# Altium PCB LED_BUFFER_v1.PcbDoc
Units mil, origin at the board's own origin, x right, y up, seen from the top; angles counter-clockwise.
Board outline 11023.62 x 1771.65 mil, 2 copper layers (Top Layer, Bottom Layer); 69 components, 164 nets, 477 pads, 85 vias.
Unrouted connection lines stored in the file: 58.
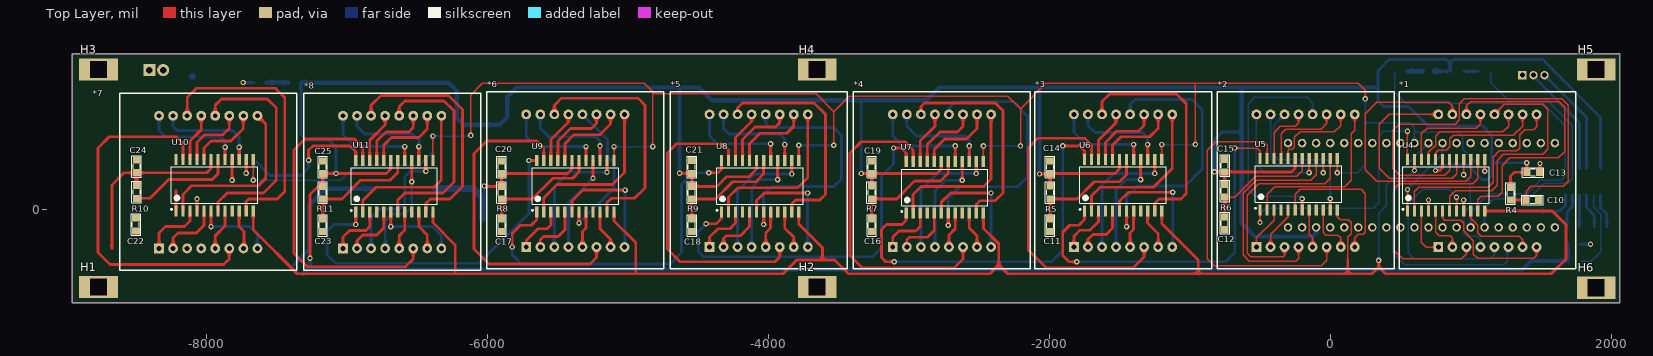
[diagram p0: Top Layer view]
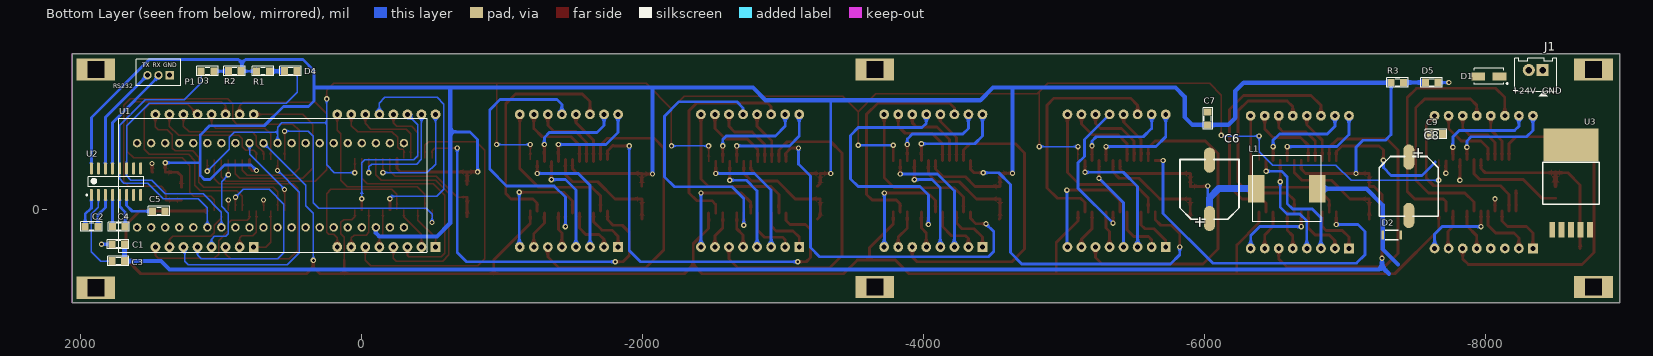
[diagram p1: Bottom Layer view, seen from below]
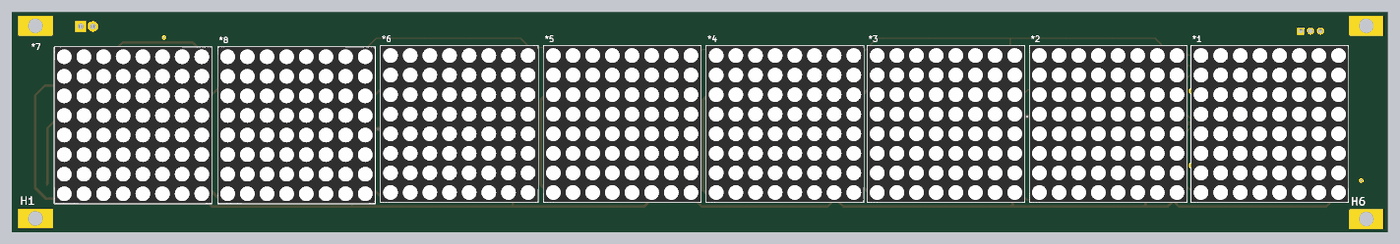
[diagram p2: 3D render of the assembled board from above, using the file's embedded part models]
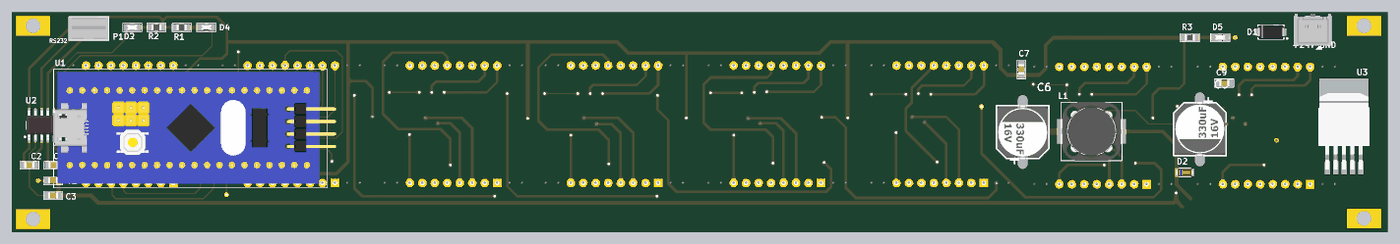
[diagram p3: 3D render of the assembled board from below, using the file's embedded part models]

## Layer stack, top to bottom
Top Solder: solder mask 0.4, Solder Resist, Dk 3.5
Top Layer: signal copper 1.4
Dielectric 1: dielectric 12.6, FR-4, Dk 4.8
Bottom Layer: signal copper 1.4
Bottom Solder: solder mask 0.4, Solder Resist, Dk 3.5

## Board outline
-8960,-661.65 -8960,1110 2063.62,1110 2063.62,-661.65

## Design rules (kind name [scope] priority, off if disabled: settings)
Clearance [All] p1: gap=10 ignorepadtopadclearanceinfootprint=FALSE
PlaneConnect [All] p1: planeconnectstyle=Direct reliefexpansion=20 reliefentries=4 reliefconductorwidth=10 reliefairgap=10
PolygonConnect [All] p1: connectstyle=Direct reliefconductorwidth=10 reliefentries=4 polygonreliefangle="90 Angle" airgapwidth=10
RoutingVias [All] p1: holewidth=20 width=38 viastyle="Through Hole" minholewidth=20 minwidth=38 maxholewidth=20 maxwidth=38
SolderMaskExpansion [All] p1: expansion=4
Width [All] p1: maxlimit=50 minlimit=10 preferedwidth=20
29 further rules are at their usual default settings.

## Components (designator, comment, footprint, x,y, rotation, side; value= is the part's Value field where it differs from the comment)
*1 "LED MATRIX 8x8" "LED MATRIX 8x8" 770,-265 r0 top
*2 "LED MATRIX 8x8" "LED MATRIX 8x8" -525,-265 r0 top
*3 "LED MATRIX 8x8" "LED MATRIX 8x8" -1825,-265 r0 top
*4 "LED MATRIX 8x8" "LED MATRIX 8x8" -3115,-265 r0 top
*5 "LED MATRIX 8x8" "LED MATRIX 8x8" -4420,-265 r0 top
*6 "LED MATRIX 8x8" "LED MATRIX 8x8" -5725,-265 r0 top
*7 "LED MATRIX 8x8" "LED MATRIX 8x8" -8340,-275 r0 top
*8 "LED MATRIX 8x8" "LED MATRIX 8x8" -7030,-275 r0 top
C1 "104" "0805 CAP" 1735,-245 r180 bottom
C2 "104" "0805 CAP" 1925,-120 r0 bottom
C3 "104" "0805 CAP" 1735,-365 r0 bottom
C4 "104" "0805 CAP" 1730.35,-120 r180 bottom
C5 "104" "0805 CAP" 1445,-10 r0 bottom
C6 "1000uF/35V" "CAP ALUMINUM SMD" -6036.38,-56.57 r90 bottom
C7 "104" "0805 CAP" -6025,650 r90 bottom
C8 "1000uF/35V" "CAP ALUMINUM SMD" -7456.38,370 r270 bottom
C9 "104" "0805 CAP" -7651.38,540 r180 bottom
C10 "104" "0805 CAP" 1440,70 r180 top
C11 "104" "0805 CAP" -1995,-110 r90 top
C12 "104" "0805 CAP" -750,-95 r90 top
C13 "104" "0805 CAP" 1445,266.93 r0 top
C14 "104" "0805 CAP" -1995,304 r90 top
C15 "104" "0805 CAP" -750,315 r90 top
C16 "104" "0805 CAP" -3265,-110 r90 top
C17 "104" "0805 CAP" -5901,-110 r90 top
C18 "104" "0805 CAP" -4545,-110 r90 top
C19 "104" "0805 CAP" -3265,304 r90 top
C20 "104" "0805 CAP" -5901,304 r90 top
C21 "104" "0805 CAP" -4545,305 r90 top
C22 "104" "0805 CAP" -8505,-105 r90 top
C23 "104" "0805 CAP" -7175,-110 r90 top
C24 "104" "0805 CAP" -8500,309 r90 top
C25 "104" "0805 CAP" -7175,304 r90 top
D1 "DIODE" "DIODE SMA" -8026.38,950 r0 bottom
D2 "SS24" "DIODE ZENER SMD" -7400,-180 r0 bottom
D3 "LED" "LED SMD 0805" 1099.45,984.08 r0 bottom
D4 "LED" "LED SMD 0805" 505.55,990.23 r180 bottom
D5 "LED" "LED SMD 0805" -7620,908.58 r180 bottom
H1 "HOLE" HOLE#1 -8771.38,-550 r0 top
H2 "HOLE" HOLE#2 -1586.38,-1200 r0 top
H3 "HOLE" HOLE#1 -8771.38,1000 r0 top
H4 "HOLE" HOLE#3 -1516.38,1700 r0 top
H5 "HOLE" HOLE#1 1893.62,1000 r0 top
H6 "HOLE" HOLE#1 1893.62,-555 r0 top
J1 "CONN HEADER VERT 2POS 2.5MM" 0353120260 -8360,995 r180 bottom
L1 "100uH" "CDRH127 - 3A" -6803.07,150 r0 bottom
P1 "Header 3H" "HDR1X3 2mm" 1368.62,958.62 r0 bottom
R1 "1k" "0805 RESISTOR" 906,987.65 r180 bottom value="R1/4W - 1K"
R2 "1k" "0805 RESISTOR" 704,986.65 r0 bottom value="R1/4W - 1K"
R3 "1k" "0805 RESISTOR" -7375,905 r0 bottom value="R1/4W - 1K"
R4 "10k" "0805 RESISTOR" 1285,115 r270 top value="R1/4W - 1K"
R5 "10k" "0805 RESISTOR" -1994,122.93 r270 top value="R1/4W - 1K"
R6 "10k" "0805 RESISTOR" -750,135 r270 top value="R1/4W - 1K"
R7 "10k" "0805 RESISTOR" -3265,122.93 r270 top value="R1/4W - 1K"
R8 "10k" "0805 RESISTOR" -5900,121.93 r270 top value="R1/4W - 1K"
R9 "10k" "0805 RESISTOR" -4545,121.93 r270 top value="R1/4W - 1K"
R10 "10k" "0805 RESISTOR" -8500,126.93 r270 top value="R1/4W - 1K"
R11 "10k" "0805 RESISTOR" -7174,121.93 r270 top value="R1/4W - 1K"
U1 "STM32 BluePill" "Arduino STM32F103" -300,475 r270 bottom
U2 "MAX232" "SOIC 16PIN" 1750.35,200.51 r90 bottom
U3 "LM2596" TO263-5 -8611.38,-141.38 r180 bottom
U4 "MAX7219" SOIC127P1030X265-24N 825,175 r90 top
U5 "MAX7219" SOIC127P1030X265-24N -225,183.07 r90 top
U6 "MAX7219" SOIC127P1030X265-24N -1475,175 r90 top
U7 "MAX7219" SOIC127P1030X265-24N -2745,160 r90 top
U8 "MAX7219" SOIC127P1030X265-24N -4060,168.07 r90 top
U9 "MAX7219" SOIC127P1030X265-24N -5375,168.07 r90 top
U10 "MAX7219" SOIC127P1030X265-24N -7945,175 r90 top
U11 "MAX7219" SOIC127P1030X265-24N -6665,168.07 r90 top

## Footprints (in the part's own frame and the unit in brackets; to place one, negate y for a bottom-side part, rotate by r counter-clockwise, add the part's x,y. Pads: shape width x height; smd on the part's side, far side on the other; paste and mask are expansions set on the pad)
"0805 CAP" [mil] "Compoment SMD 80x50mil"
  rect 50x55 smd: 1(-45,0) 2(45,0)
  silkscreen extent -77,-34 76,33, body extent -40,-25 40,25, height 24
"0805 RESISTOR" [mil] "Compoment SMD 80x50mil"
  rect 50x55 smd: 1(-45,0) 2(45,0)
  silkscreen extent -77,-34 76,33, body extent -39,-25 39,25, height 24
0353120260 [mm]
  rect 2.2x2.2 hole 1.2: 1(1.25,0)
  round 2.2 hole 1.2: 2(-1.25,0)
  silkscreen extent -3.75,-4.75 3.77,2.12, body extent -3.68,-3.87 3.78,2.63, height 7.02
"Arduino STM32F103" [mil]
  round 60 hole 35.43: 1(0,0) 2(0,-100) 3(0,-200) 4(0,-300) 5(0,-400) 6(0,-500) 7(0,-600) 8(0,-700) 9(0,-800) 10(0,-900) 11(0,-1000) 12(0,-1100) 13(0,-1200) 14(0,-1300) 15(0,-1400) 16(0,-1500) 17(0,-1600) 18(0,-1700) 19(0,-1800) 20(0,-1900) 21(600,0) 22(600,-100) 23(600,-200) 24(600,-300) 25(600,-400) 26(600,-500) 27(600,-600) 28(600,-700) 29(600,-800) 30(600,-900) 31(600,-1000) 32(600,-1100) 33(600,-1200) 34(600,-1300) 35(600,-1400) 36(600,-1500) 37(600,-1600) 38(600,-1700) 39(600,-1800) 40(600,-1900)
  silkscreen extent -175,-2030 780,165, body extent -155,-2035 745,231, height 700
"CAP ALUMINUM SMD" [mil] "330-470uF"
  oval 179.37x79.37 smd: 1(-5,0) 2(410,0)
  silkscreen extent -10,-210 415,210, body extent -17,-203 417,203, height 437
"CDRH127 - 3A" [mm] "12x12x7mm"
  rect 3x5 smd: 1(0,0) 2(11,0)
  silkscreen extent -0.76,-5.97 11.68,5.97, body extent -0.71,-6 11.63,6, height 7.4
"DIODE SMA" [mm]
  rect 2.45x1.5 smd: 1(-1.925,0) 2(1.925,0)
  silkscreen extent -3.42,-1.45 2.65,1.45, body extent -2.8,-1.48 2.8,1.47, height 2.7
"DIODE ZENER SMD" [mm]
  rect 0.47x1.6 smd: 1(0,0) 2(3.302,0)
  silkscreen extent 0.51,-0.89 2.79,0.89, body extent -0.1,-0.73 3.4,0.73, height 1.43
"HDR1X3 2mm" [mm] "Connector; Header; 3 Position"
  rect 1.5x1.5 hole 0.9: 1(0,0)
  round 1.5 hole 0.9: 2(2,0) 3(4,0)
  silkscreen extent -2.03,-2.92 6.03,1.91, body extent -1.97,-2.83 6.03,1.82, height 6.02
HOLE#1 [mm]
  rect 7x4 hole 3 square: H(0,0)
HOLE#2 [mm]
  rect 7x4 hole 3 square: H(-52.499,16.51)
HOLE#3 [mm]
  rect 7x4 hole 3 square: H(-54.277,-17.78)
"LED MATRIX 8x8" [mil]
  rect 70x70 hole 35: 1(0,0)
  round 70 hole 35: 2(100,0) 3(200,0) 4(300,0) 5(400,0) 6(500,0) 7(600,0) 8(700,0) 9(700,944.88) 10(600,944.88) 11(500,944.88) 12(400,944.88) 13(300,944.88) 14(200,944.88) 15(100,944.88) 16(0,944.88)
  silkscreen extent -280,-155 980,1105, body extent -280,-155 980,1105, height 515
"LED SMD 0805" [mil] "Compoment SMD 80x50mil"
  rect 50x55 smd: 1(-45.39,-2.58) 2(44.61,-2.58)
  silkscreen extent -77,-37 76,30, body extent -41,-21 41,15, height 33
SOIC127P1030X265-24N [mm] "SOIC 24, Pitch 1.27mm - Body 7.6x15.6mm, IPC Medium Density"
  rect 2x0.6 smd: 1(-4.65,6.985) 2(-4.65,5.715) 3(-4.65,4.445) 4(-4.65,3.175) 5(-4.65,1.905) 6(-4.65,0.635) 7(-4.65,-0.635) 8(-4.65,-1.905) 9(-4.65,-3.175) 10(-4.65,-4.445) 11(-4.65,-5.715) 12(-4.65,-6.985) 13(4.65,-6.985) 14(4.65,-5.715) 15(4.65,-4.445) 16(4.65,-3.175) 17(4.65,-1.905) 18(4.65,-0.635) 19(4.65,0.635) 20(4.65,1.905) 21(4.65,3.175) 22(4.65,4.445) 23(4.65,5.715) 24(4.65,6.985)
  silkscreen extent -4.5,-7.8 3.3,7.9, body extent -5.18,-7.8 5.18,7.8, height 1.68
"SOIC 16PIN" [mm]
  oval 2.2x0.6 smd: 1(-2.4,4.445) 2(-2.4,3.175) 3(-2.4,1.905) 4(-2.4,0.635) 5(-2.4,-0.635) 6(-2.4,-1.905) 7(-2.4,-3.175) 8(-2.4,-4.445) 9(2.4,-4.445) 10(2.4,-3.175) 11(2.4,-1.905) 12(2.4,-0.635) 13(2.4,0.635) 14(2.4,1.905) 15(2.4,3.175) 16(2.4,4.445)
  silkscreen extent -2.52,-5 0.9,5.42, body extent -3,-4.95 3,4.95, height 1.4
TO263-5 [mm] "LM2576-SMD"
  rect 1.07x2.75 smd: 1(-3.4,-0.025) 2(-1.7,-0.025) 3(0,-0.025) 4(1.7,-0.025) 5(3.4,-0.025)
  rect 10x6 smd: 3(0,15.289)
  silkscreen extent -5.08,4.57 5.08,12.19, body extent -5,-0.38 5,15.29, height 4.79

## Part data
C1 C2 C3 C4 C5 C7 C9 C10 C11 C12 C13 C14 C15 C16 C17 C18 C19 C20 C21 C22 C23 C24 C25: library part "CAP CERAMIC", LatestRevisionDate=17-Jul-2002, LatestRevisionNote="Re-released for DXP Platform.", PackageReference=RAD-0.3, Published=8-Jun-2000, Publisher="Altium Limited"
C6 C8: library part CAPACITOR
D2: library part SS1x
L1: library part INDUCTOR
R1 R2 R3 R4 R5 R6 R7 R8 R9 R10 R11: library part RESISTOR
U1: library part "STM32 Bluepill"
J1: P/N=0353120260
P1: LatestRevisionDate=17-Jul-2002, LatestRevisionNote="Re-released for DXP Platform.", Publisher="Altium Limited"

## Via types
v1: diameter 38, hole 20, Top Layer to Bottom Layer, tented both sides, 77 vias
v2: diameter 38, hole 20, Top Layer to Bottom Layer, 8 vias

## Nets (pads, with @x,y where several pads share a name; then routed paths per layer and width w, separated by ;. In a path a pad name is that pad's centre, name@x,y a point inside that pad or via, vN(x,y) a via of type N, cw(c..) or ccw(c..) an arc to the next point about the centre after c; other vN are vias at no path point)
1_COL1: *1.13 U4.22 | length 700.8
  Top Layer w10: U4.22 650,540 690,580 1040,580 1070,610 *1.13
1_COL2: *1.3 U4.14 | length 1807.5
  Top Layer w10: *1.3 970,-315 935,-350 515,-350 455,-290 455,151.93 488.07,185 1015,185 1050,220 U4.14
1_COL3: *1.4 U4.16 | length 759.9
  Top Layer w10: v1(950,250) U4.16
  Bottom Layer w10: v1(950,250) 998.62,201.38 998.62,23.62 950,-25 950,-170 970,-190 1050,-190 1070,-210 *1.4
1_COL4: *1.10 U4.20 | length 862.7
  Top Layer w10: U4.20 750,405 770,425 825,425 850,450 850,505 875,530 1305,530 1370,595 *1.10
1_COL5: *1.6 U4.23 | length 1692
  Top Layer w10: v1(600,280) U4.23
  Bottom Layer w10: v1(600,280) 445,125 445,-305 530,-390 1235,-390 1260,-365 1260,-275 *1.6
1_COL6: *1.11 U4.21 | length 821.5
  Top Layer w10: U4.21 700,410 750,460 750,525 780,555 1230,555 1270,595 *1.11
1_COL7: *1.15 U4.15 | length 2042.2
  Top Layer w10: *1.15 870,740 845,765 330,765 250,685 250,285 330,205 970,205 1000,235 U4.15
1_COL8: *1.16 U4.17 | length 1458.4
  Top Layer w10: *1.16 419.88,679.88 350,610 350,295 420,225 870,225 900,255 U4.17
1_ISET: C10.2 R4.2 U4.18 | length 3260.3
  Top Layer w10: U4.18 850,280 815,245 495,245 445,295 445,565 490,610 890,610 920,640 920,755 955,790 1650,790 1695,745 1695,205 1657.93,167.93 1430,167.93 1395,132.93 C10.2
  Top Layer w20: R4.2 C10.2
1_ROW1: *1.9 U4.2 | length 1449.6
  Top Layer w10: U4.2 600,130 630,160 1125,160 1160,195 1160,375 1205,420 1330,420 1350,440 1350,535 1385,570 1450,570 1470,590 *1.9
1_ROW2: *1.14 U4.11 | length 2056.4
  Top Layer w10: *1.14 970,740 1000,770 1630,770 1670,730 1670,415 1625,370 1280,370 1225,315 1225,125 1196,96 1076,96 1050,70 U4.11
1_ROW3: *1.8 U4.6 | length 996.1
  Top Layer w10: U4.6 800,-60 815,-75 930,-75 950,-95 950,-150 1020,-220 1020,-315 1050,-345 1450,-345 1470,-325 *1.8
1_ROW4: *1.12 U4.7 | length 1760
  Top Layer w10: U4.7 850,95 890,135 1150,135 1190,175 1190,350 1234,394 1514,394 1550,430 1550,715 1515,750 1240.12,750 *1.12
  Bottom Layer w10: *1.12 *1.12@1175,674.88
1_ROW5: *1.1 U4.3 | length 356.4
  Top Layer w10: U4.3 650,-230 685,-265 *1.1
1_ROW6: *1.7 U4.10 | length 568.4
  Top Layer w10: U4.10 1000,-60 1050,-110 1050,-165 1075,-190 1345,-190 1370,-215 *1.7
1_ROW7: *1.2 U4.5 | length 353.5
  Top Layer w10: U4.5 750,-160 775,-185 855,-185 870,-200 *1.2
1_ROW8: *1.5 U4.8 | length 1558.3
  Top Layer w10: U4.8 v1(900,90)
  Bottom Layer w10: v1(900,90) 845,145 660,145 555,40 555,-305 600,-350 1145,-350 1170,-325 *1.5
1_V+: C1.2 C3.1 C6.1 C7.1 C13.1 C14.1 C15.1 C19.1 C20.1 C21.1 C24.1 C25.1 L1.2 R1.2 R2.2 R3.2 R4.1 R5.1 R6.1 R7.1 R8.1 R9.1 R10.1 R11.1 U1.23 U2.16 U3.4 U4.19 U5.19 U6.19 U7.19 U8.19 U9.19 U10.19 U11.19 | length 33837.3
  Top Layer w20: -8676.38,-275 -8676.38,176.93 -8589.31,264 C24.1 -8001,264 -7970,295 U10.19 ; v1(-7265,-345) -7265,110 -7208.07,166.93 R11.1 -7175,167.93 C25.1 v1(-7080,259) -6721,259 -6690,290 U11.19 ; v1(-6025,170) -6021.93,166.93 R8.1 -5901,167.93 C20.1 -5431,259 -5400,290 U9.19 ; v1(-4634,260) C21.1 R9.1 -4368.07,166.93 -4300,235 -4140,235 -4085,290 U8.19 ; v1(-3340,259) C19.1 -3265,187.93 R7.1@-3245,167.93 ; C19.1@-3245,259 -2800,259 -2770,289 U7.19 ; v1(-2070,255) -1999,255 C14.1 -1532.93,259 -1500,291.93 U6.19 ; R5.1 C14.1@-1994,258 ; v1(-825,270) C15.1 ; R6.1 C15.1 ; U5.19 -250,295 -275,270 C15.1 ; v1(750,280) 780,280 800,300 U4.19 ; R4.1 1285,240 1311.93,266.93 C13.1 v1(1400,335)
  Top Layer w30: R10.1 C24.1
  Bottom Layer w20: R3.2 -7330,535 -7290,495 -7130,495 -7080,445 v1(-7080,259) ; -6036.38,85 -6025,96.38 v1(-6025,170) ; v1(-3340,259) -3340,780 ; v1(-825,270) -825,500 -770,555 -630,555 ; R2.2 749.5,987.15 860.5,987.15 R1.2 853.47,995.19 853.47,1045.15 ; v1(750,280) 788.35,318.35 978.01,318.35 1081.35,215 1121.65,215 1150,243.35 1150,333.35 ; v1(1400,335) 1151.65,335 1150,333.35 ; U2.16 1925.35,658.27 1513.62,1070 908.62,1070 878.32,1070 853.47,1045.15 ; 853.47,1045.15 828.62,1070 420,1070 340,990 340,775 380,735 558.35,735 695,598.35 1085,598.35 1150,533.35 1150,333.35
  Bottom Layer w30: R3.2 -6280,905 -6220,845 -6220,655 -6170,605 C7.1 -5915,605 -5860,660 -5860,805 -5795,870 -4635,870 ; -7315,-455 -7265,-405 ; v1(-7265,-345) -7265,-405 ; v1(-4634,260) -4634,869 -4635,870 ; v1(-2070,255) -2070,865 -2075,870 ; U1.23 -100,-165 -125,-190 -535,-190 -630,-95 -630,555 -630,860 -640,870 ; 330,870 -640,870 ; C1.2 C3.1 1430,-365 1370,-425 -7245,-425 -7265,-405 ; -4635,870 -4495,870 -4405,780 -3340,780 -2875,780 -2785,870 -2075,870 ; -2075,870 -640,870
  Bottom Layer w50: L1.2 -6101.38,150 -6036.38,85 C6.1 ; R2.2 R2.2@749,987.15
2_COL1: *2.13 U5.22 | length 447.7
  Top Layer w10: U5.22 -400,550 -355,595 -250,595 -225,620 *2.13
2_COL2: *2.3 U5.14 | length 1535.3
  Top Layer w10: *2.3 -325,-325 -335,-335 -565,-335 -590,-310 -590,105 -510,185 -40,185 0,225 U5.14
2_COL3: *2.4 U5.16 | length 1630.1
  Top Layer w10: *2.4 -225,-345 -245,-365 -575,-365 -620,-320 -620,116.93 -526.93,210 -140,210 -100,250 U5.16
2_COL4: *2.10 U5.20 | length 627.2
  Top Layer w10: U5.20 -300,425 -295,430 -270,430 -255,445 -255,515 -215,555 30,555 75,600 *2.10
2_COL5: *2.6 U5.23 | length 2311.3
  Top Layer w10: U5.23 -450,460 -475,485 -815,485 -875,425 -875,-350 -825,-400 -65,-400 -25,-360 *2.6
2_COL6: *2.11 U5.21 | length 594.8
  Top Layer w10: U5.21 -347.5,368.64 -347.5,542.5 -315,575 -65,575 -25,615 *2.11
2_COL7: *2.15 U5.15 | length 860.8
  Top Layer w10: v1(-50,264) U5.15
  Bottom Layer w10: *2.15 -425,360 -390,325 -70,325 -50,305 v1(-50,264)
2_COL8: *2.16 U5.17 | length 855.3
  Top Layer w10: v1(-150,265) U5.17
  Bottom Layer w10: *2.16 -525,326 -464,265 v1(-150,265)
2_ISET: C12.2 R6.2 U5.18 | length 855.4
  Top Layer w10: R6.2 -680,90 -530,240 -239,240 -200,279 U5.18
  Top Layer w20: C12.2 R6.2
2_ROW1: *2.9 U5.2 | length 1231.7
  Top Layer w10: U5.2 -450,110 -395,165 105,165 150,210 150,540 175,565 *2.9
2_ROW2: *2.14 U5.11 | length 1060.4
  Top Layer w20: U5.11 v1(0,78.74)
  Bottom Layer w10: *2.14 -400,604.88 -400,385 -370,355 -20,355 0,335 0,100
2_ROW3: *2.8 U5.6 | length 1068.5
  Top Layer w10: U5.6 -250,110 -215,145 220,145 250,115 250,-160 235,-175 200,-175 175,-200 *2.8
2_ROW4: *2.12 U5.7 | length 1665.8
  Top Layer w20: U5.7 v1(-200,78.74)
  Bottom Layer w10: v1@-200,96 -533,96 -585,148 -585,752 -537,800 -165,800 -125,760 *2.12
2_ROW5: *2.1 U5.3 | length 316.8
  Top Layer w10: *2.1 -525,-200 -400,-75 U5.3
2_ROW6: *2.7 U5.10 | length 366.6
  Top Layer w10: U5.10 -50,-160 -30,-180 55,-180 75,-200 *2.7
2_ROW7: *2.2 U5.5 | length 316.8
  Top Layer w10: *2.2 -425,-175 -300,-50 U5.5
2_ROW8: *2.5 U5.8 | length 275.4
  Top Layer w10: U5.8 -150,-175 -125,-200 *2.5
3_COL1: *3.13 U6.22 | length 388.6
  Top Layer w20: U6.22@-1650,343.07 U6.22 -1650,495 -1525,620 *3.13
3_COL2: *3.3 U6.14 | length 933.9
  Top Layer w20: v1(-1250,259) U6.14@-1250,343.07
  Bottom Layer w20: *3.3 -1625,175 -1541,259 v1(-1250,259)
3_COL3: *3.4 U6.16 | length 739.1
  Top Layer w20: v1(-1350,215) U6.16@-1350,343.07
  Bottom Layer w20: *3.4 -1525,140 -1450,215 v1(-1350,215)
3_COL4: *3.10 U6.20 | length 591.5
  Top Layer w20: U6.20@-1550,343.07 U6.20 -1550,460 -1490,520 -1285,520 -1225,580 *3.10
3_COL5: *3.6 U6.23 | length 2308.6
  Top Layer w20: U6.23 -1700,460 -1750,510 -2080,510 -2150,440 -2150,-285 -2020,-415 -1405,-415 -1325,-335 *3.6
3_COL6: *3.11 U6.21 | length 541.5
  Top Layer w20: U6.21@-1600,343.07 U6.21 -1600,480 -1520,560 -1365,560 -1325,600 *3.11
3_COL7: *3.15 U6.15 | length 712
  Top Layer w20: U6.15@-1300,343.07 U6.15 v1(-1300,465)
  Bottom Layer w20: *3.15 -1725,600 -1675,550 -1335,550 -1300,515 v1(-1300,465)
3_COL8: *3.16 U6.17 | length 712
  Top Layer w20: U6.17@-1400,343.07 U6.17 v1(-1400,465)
  Bottom Layer w20: *3.16 -1825,550 -1740,465 v1(-1400,465)
3_DOUT: U6.24 U7.1 | length 2770
  Top Layer w20: v1(-3105,-370) -3165,-370 -3195,-340 -3195,-140 -3160,-105 -3050,-105 -3020,-75 U7.1 ; v1(-1905,455) -1795,455 -1790,460 -1750,420 U6.24
  Bottom Layer w20: v1(-3105,-370) -1985,-370 -1905,-290 v1(-1905,455)
3_ISET: C11.2 R5.2 U6.18 | length 867.3
  Top Layer w20: C11.2 -1995,77.93 R5.2 -1802.07,77.93 -1680,200 -1500,200 -1450,250 U6.18
3_ROW1: *3.9 U6.2 | length 1148.7
  Top Layer w20: U6.2 -1700,100 -1640,160 -1260,160 -1125,295 *3.9
3_ROW2: *3.14 U6.11 | length 1689.8
  Top Layer w20: *3.14 -1625,770 -1570,825 -1095,825 -1025,755 -1025,115 -1062.07,77.93 -1218.45,77.93 -1248.19,48.19 -1248.19,-6.26 U6.11
3_ROW3: *3.8 U6.6 | length 884.3
  Top Layer w20: U6.6@-1500,-23.07 U6.6 -1500,61.38 -1436.38,125 v1(-1121.38,125)
  Bottom Layer w20: *3.8 -1129.04,-260.96 -1121.38,-253.31 v1(-1121.38,125)
3_ROW4: *3.12 U6.7 | length 1978.8
  Top Layer w20: v1(-1450,-120) U6.7@-1450,-23.07
  Bottom Layer w20: v1(-1450,-120) -1450,90 -1370,170 -1031.38,170 -911,290.38 -911,711 -985,785 -1390,785 -1425,750 *3.12
3_ROW5: *3.1 U6.3 | length 356.6
  Top Layer w20: *3.1 -1825,-187.93 -1782.07,-145 -1710,-145 -1650,-85 U6.3@-1650,-23.07
3_ROW6: *3.7 U6.10 | length 273
  Top Layer w20: U6.10@-1300,-23.07 -1300,-95 -1225,-170 *3.7
3_ROW7: *3.2 U6.5 | length 370.1
  Top Layer w20: *3.2 -1725,-210 -1690,-175 -1595,-175 -1550,-130 U6.5@-1550,-23.07
3_ROW8: *3.5 U6.8 | length 252.3
  Top Layer w20: *3.5 -1425,-165 -1400,-140 U6.8@-1400,-23.07
4_COL1: *4.13 U7.22 | length 380.3
  Top Layer w20: U7.22 -2920,490 -2815,595 *4.13
4_COL2: *4.3 U7.14 | length 933.4
  Top Layer w20: v1(-2520,259) U7.14
  Bottom Layer w20: *4.3 -2915,140 -2796,259 v1(-2520,259)
4_COL3: *4.4 U7.16 | length 759.1
  Top Layer w20: v1(-2620,210) U7.16
  Bottom Layer w20: *4.4 -2815,135 -2740,210 v1(-2620,210)
4_COL4: *4.10 U7.20 | length 553.9
  Top Layer w20: U7.20 -2820,430 -2745,505 -2590,505 -2515,580 *4.10
4_COL5: *4.6 U7.23 | length 2274.1
  Top Layer w20: U7.23 -2970,425 -3030,485 -3340,485 -3420,405 -3420,-325 -3330,-415 -2680,-415 -2615,-350 *4.6
4_COL6: *4.11 U7.21 | length 515.7
  Top Layer w20: U7.21 -2870,465 -2780,555 -2655,555 -2615,595 *4.11
4_COL7: *4.15 U7.15 | length 726.2
  Top Layer w20: U7.15 v1(-2570,455)
  Bottom Layer w20: *4.15 -3015,595 -2945,525 -2595,525 -2570,500 v1(-2570,455)
4_COL8: *4.16 U7.17 | length 740.8
  Top Layer w20: U7.17 v1(-2670,455)
  Bottom Layer w20: *4.16 -3115,525 -3045,455 v1(-2670,455)
4_ISET: C16.2 R7.2 U7.18 | length 854.7
  Top Layer w20: C16.2@-3245,-65 -3265,-45 R7.2 -3087.07,77.93 -2960,205 -2775,205 -2720,260 U7.18
4_ROW1: *4.9 U7.2 | length 1193.5
  Top Layer w20: U7.2 -2970,110 -2913.07,166.93 -2468.07,166.93 -2415,220 *4.9
4_ROW2: *4.14 U7.11 | length 1543.9
  Top Layer w20: *4.14 -2915,735 -2890,760 -2385,760 -2330,705 -2330,120 -2385,65 -2494,65 -2520,39 U7.11
4_ROW3: *4.8 U7.6 | length 844.4
  Top Layer w20: U7.6 -2770,54 -2704,120 v1(-2415,120)
  Bottom Layer w20: *4.8 v1(-2415,120)
4_ROW4: *4.12 U7.7 | length 2002.6
  Top Layer w20: v1(-2720,-110) U7.7
  Bottom Layer w20: v1(-2720,-110) -2720,80 -2636,164 -2226,164 -2156,234 -2156,666 -2260,770 -2670,770 -2715,725 *4.12
4_ROW5: *4.1 U7.3 | length 394.3
  Top Layer w20: *4.1 -3115,-193.62 -3071.38,-150 -2949.16,-150 -2920,-120.84 U7.3
4_ROW6: *4.7 U7.10 | length 264.7
  Top Layer w20: U7.10 -2570,-130 -2515,-185 *4.7
4_ROW7: *4.2 U7.5 | length 398.9
  Top Layer w20: *4.2 -3015,-213.62 -2996.38,-195 -2866.38,-195 -2820,-148.62 U7.5
4_ROW8: *4.5 U7.8 | length 260.6
  Top Layer w20: *4.5 -2715,-180 -2670,-135 U7.8
5_COL1: *5.13 U8.22 | length 376.4
  Top Layer w20: U8.22 -4235,515 -4120,630 *5.13
5_COL2: *5.3 U8.14 | length 930.8
  Top Layer w20: v1(-3835,255) U8.14
  Bottom Layer w20: *5.3 -4220,135 -4100,255 v1(-3835,255)
5_COL3: *5.4 U8.16 | length 766
  Top Layer w20: v1(-3935,215) U8.16
  Bottom Layer w20: *5.4 -4120,155 -4060,215 v1(-3935,215)
5_COL4: *5.10 U8.20 | length 570.5
  Top Layer w20: U8.20 -4135,470 -4060,545 -3870,545 -3820,595 *5.10
5_COL5: *5.6 U8.23 | length 2161.2
  Top Layer w20: U8.23 -4285,425 -4330,470 -4655,470 -4720,405 -4720,-280 -4630,-370 -3955,-370 -3920,-335 *5.6
5_COL6: *5.11 U8.21 | length 523.4
  Top Layer w20: U8.21 -4185,500 -4095,590 -3950,590 -3920,620 *5.11
5_COL7: *5.15 U8.15 | length 719.8
  Top Layer w20: U8.15 v1(-3885,465)
  Bottom Layer w20: *5.15 -4320,580 -4280,540 -3920,540 -3885,505 v1(-3885,465)
5_COL8: *5.16 U8.17 | length 731.5
  Top Layer w20: U8.17 v1(-3985,470)
  Bottom Layer w20: *5.16 -4420,525 -4365,470 v1(-3985,470)
5_ISET: C18.2 R9.2 U8.18 | length 823.9
  Top Layer w20: C18.2@-4540,-65 -4545,-60 R9.2 -4378.07,76.93 -4255,200 -4090,200 -4035,255 U8.18
5_ROW1: *5.9 U8.2 | length 1177.9
  Top Layer w20: U8.2 -4285,90 -4218.62,156.38 -3793.62,156.38 -3720,230 *5.9
5_ROW2: *5.14 U8.11 | length 1612.6
  Top Layer w20: *5.14 -4220,725 -4185,760 -3675,760 -3595,680 -3595,110 -3634.76,70.24 -3806.14,70.24 -3833.19,43.19 -3833.19,-13.19 U8.11
5_ROW3: *5.8 U8.6 | length 855
  Top Layer w20: U8.6 -4085,65 -4030,120 v1(-3721.38,120)
  Bottom Layer w20: v1(-3721.38,120) -3721.38,-256.38 -3716.38,-261.38 *5.8
5_ROW4: *5.12 U8.7 | length 1852.7
  Top Layer w20: v1(-4035,-105) U8.7
  Bottom Layer w20: v1(-4035,-105) -4035,105 -3975,165 -3535,165 -3480,220 -3480,530 -3535,585 -3990,585 -4020,615 *5.12
5_ROW5: *5.1 U8.3 | length 376.4
  Top Layer w20: *5.1 -4420,-195 -4360,-135 -4275,-135 -4235,-95 U8.3
5_ROW6: *5.7 U8.10 | length 276.9
  Top Layer w20: U8.10 -3885,-130 -3820,-195 *5.7
5_ROW7: *5.2 U8.5 | length 385.2
  Top Layer w20: *5.2 -4320,-205 -4300,-185 -4200,-185 -4135,-120 U8.5
5_ROW8: *5.5 U8.8 | length 264.5
  Top Layer w20: *5.5 -4020,-165 -3985,-130 U8.8
6_COL1: *6.13 U9.22 | length 380.5
  Top Layer w20: U9.22 -5550,500 -5425,625 *6.13
6_COL2: *6.3 U9.14 | length 931.4
  Top Layer w20: v1(-5150,266.93) U9.14
  Bottom Layer w20: *6.3 -5525,165 -5423.07,266.93 v1(-5150,266.93)
6_COL3: *6.4 U9.16 | length 688.6
  Top Layer w20: v1(-5250,225) U9.16
  Bottom Layer w20: *6.4 -5425,50 v1(-5250,225)
6_COL4: *6.10 U9.20 | length 571.7
  Top Layer w20: U9.20 -5450,470 -5385,535 -5200,535 -5125,610 *6.10
6_COL5: *6.6 U9.23 | length 2331.7
  Top Layer w20: U9.23 -5600,440 -5650,490 -6006.38,490 -6096.38,400 -6096.38,-280 -5991.38,-385 -5270,-385 -5225,-340 *6.6
6_COL6: *6.11 U9.21 | length 530.5
  Top Layer w20: U9.21 -5500,490 -5410,580 -5260,580 -5225,615 *6.11
6_COL7: *6.15 U9.15 | length 701
  Top Layer w20: U9.15 v1(-5200,455)
  Bottom Layer w20: *6.15 -5625,580 -5565,520 -5230,520 -5200,490 v1(-5200,455)
6_COL8: *6.16 U9.17 | length 712.7
  Top Layer w20: U9.17 v1(-5300,450)
  Bottom Layer w20: *6.16 -5725,520 -5655,450 v1(-5300,450)
6_DOUT: U9.24 U11.1 | length 2524.6
  Top Layer w20: v1(-6940,-105) U11.1 ; v2(-5706.38,351.14) U9.24
  Bottom Layer w20: v1(-6940,-105) -7095,-105 -7145,-155 -7145,-320 -7085,-380 -6060,-380 -5706.38,-26.38 v2(-5706.38,351.14)
6_ISET: C17.2 R8.2 U9.18 | length 854
  Top Layer w20: C17.2 -5900,-64 R8.2 -5683.07,76.93 -5535,225 -5394,225 -5350,269 U9.18
6_ROW1: *6.9 U9.2 | length 1165
  Top Layer w20: U9.2 -5600,86 -5506,180 -5110,180 -5025,265 *6.9
6_ROW2: *6.14 U9.11 | length 1720
  Top Layer w20: *6.14 -5525,745 -5475,795 -4930,795 -4880,745 -4880,156.38 -4954.45,81.93 -5119.45,81.93 -5150,51.38 U9.11
6_ROW3: *6.8 U9.6 | length 902.4
  Top Layer w20: U9.6 -5400,61.38 -5321.38,140 v1(-5021.38,140)
  Bottom Layer w20: *6.8 -5011.38,-251.38 -5021.38,-241.38 v1(-5021.38,140)
6_ROW4: *6.12 U9.7 | length 1050.5
  Top Layer w20: v1(-5350,-95) U9.7
  Bottom Layer w20: v1(-5350,-95) -5101.38,153.62 -5101.38,335 -5146.38,380 -5146.38,501.26 *6.12
6_ROW5: *6.1 U9.3 | length 360.6
  Top Layer w20: *6.1 -5725,-218.62 -5641.38,-135 -5576.38,-135 -5550,-108.62 U9.3
6_ROW6: *6.7 U9.10 | length 281.1
  Top Layer w20: U9.10 -5200,-135 -5125,-210 *6.7
6_ROW7: *6.2 U9.5 | length 383.2
  Top Layer w20: *6.2 -5625,-213.62 -5601.38,-190 -5497.76,-190 -5450,-142.24 U9.5
6_ROW8: *6.5 U9.8 | length 260.4
  Top Layer w20: *6.5 -5325,-155 -5300,-130 U9.8
7_COL1: *8.13 U11.22 | length 364.3
  Top Layer w20: U11.22 -6840,495 -6730,605 *8.13
7_COL2: *8.3 U11.14 | length 933.2
  Top Layer w20: v1(-6440,275) U11.14
  Bottom Layer w20: *8.3 -6830,-56.57 -6768.43,5 -6630,5 -6590,45 -6590,235 -6550,275 v1(-6440,275)
7_COL3: *8.4 U11.16 | length 757.6
  Top Layer w20: v1(-6540,200) U11.16
  Bottom Layer w20: *8.4 -6730,-80 -6680,-30 -6590,-30 -6540,20 v1(-6540,200)
7_COL4: *8.10 U11.20 | length 561.4
  Top Layer w20: U11.20 -6740,460 -6685,515 -6490,515 -6430,575 *8.10
7_COL5: *8.6 U11.23 | length 2364
  Top Layer w20: U11.23 -6890,445 -6950,505 -7300,505 -7380,425 -7380,-310 -7285,-405 -6585,-405 -6530,-350 *8.6
7_COL6: *8.11 U11.21 | length 523.1
  Top Layer w20: U11.21 -6790,490 -6725,555 -6560,555 -6530,585 *8.11
7_COL7: *8.15 U11.15 | length 700.2
  Top Layer w20: U11.15 v1(-6490,450)
  Bottom Layer w20: *8.15 -6930,595 -6875,540 -6535,540 -6490,495 v1(-6490,450)
7_COL8: *8.16 U11.17 | length 708.9
  Top Layer w20: U11.17 v1(-6590,450)
  Bottom Layer w20: *8.16 -7030,535 -6945,450 v1(-6590,450)
7_ISET: C23.2 R11.2 U11.18 | length 839.6
  Top Layer w20: C23.2 -7174,-64 R11.2 -7038.07,76.93 -6905,210 -6696.38,210 -6640,266.38 U11.18
7_ROW1: *8.9 U11.2 | length 1159.1
  Top Layer w20: U11.2 -6890,65 -6794,161 -6380.38,161 -6330,211.38 *8.9
7_ROW2: *8.14 U11.11 | length 1715.2
  Top Layer w20: *8.14 -6830,745 -6760,815 -6280,815 -6180,715 -6180,166.38 -6268.45,77.93 -6408.45,77.93 -6440,46.38 U11.11
7_ROW3: *8.8 U11.6 | length 589
  Top Layer w20: v1(-6690,-120) U11.6
  Bottom Layer w20: v1(-6690,-120) -6395,-120 -6330,-185 *8.8 *8.8@-6335,-270
7_ROW4: *8.12 U11.7 | length 1545.5
  Top Layer w20: U11.7 -6640,70 -6590,120 -6318.31,120 -6240,198.31 -6240,705 -6310,775 -6590,775 -6630,735 *8.12
7_ROW5: *8.1 U11.3 | length 406.1
  Top Layer w20: *8.1 -7030,-195 -6982.5,-147.5 -6867.5,-147.5 -6840,-120 U11.3
7_ROW6: *8.7 U11.10 | length 284.9
  Top Layer w20: U11.10 -6490,-120 -6430,-180 *8.7
7_ROW7: *8.2 U11.5 | length 397.3
  Top Layer w20: *8.2 -6930,-220 -6890,-180 -6790,-180 -6740,-130 U11.5
7_ROW8: *8.5 U11.8 | length 276.6
  Top Layer w20: *8.5 -6630,-185 -6590,-145 U11.8
8_COL1: *7.13 U10.22 | length 344.9
  Top Layer w20: U10.22 -8120,490 -8040,570 *7.13
8_COL2: *7.3 U10.14 | length 90.1
  Top Layer w20: v1(-7720,260) -7720,343.07 -7722.5,345.57 U10.14@-7720,348.07
8_COL3: *7.4 U10.16 | length 148.1
  Top Layer w20: v1(-7820,210) U10.16
8_COL4: *7.10 U10.20 | length 509.8
  Top Layer w20: U10.20 -8020,440 -7970,490 -7830,490 -7740,580 *7.10
8_COL5: *7.6 U10.23 | length 2577.9
  Top Layer w20: U10.23 -8170,470 -8220,520 -8695,520 -8775.38,439.62 -8775.38,-304.62 -8690,-390 -7880,-390 -7840,-350 *7.6
8_COL6: *7.11 U10.21 | length 483.2
  Top Layer w20: U10.21 -8070,480 -8015,535 -7885,535 -7840,580 *7.11
8_COL7: *7.15 U10.15 | length 737.9
  Top Layer w20: U10.15 v1(-7770,445)
  Bottom Layer w20: *7.15 -8240,595 -8210,565 -7815,565 -7770,520 v1(-7770,445)
8_COL8: *7.16 U10.17 | length 737.9
  Top Layer w20: U10.17 v1(-7870,445)
  Bottom Layer w20: *7.16 -8340,565 -8295,520 -7900,520 -7870,490 v1(-7870,445)
8_ISET: C22.2 R10.2 U10.18 | length 754
  Top Layer w20: R10.2 -8404.45,81.93 -8271.38,215 -7961.38,215 -7920,256.38 U10.18
8_ROW1: *7.9 U10.2 | length 1225.4
  Top Layer w20: U10.2 -8170,110 -8109,171 -7634,171 -7580,225 -7580,609.88 *7.9
8_ROW2: *7.14 U10.11 | length 1920
  Top Layer w20: *7.14 -8140,800 -8075,865 -7510,865 -7445,800 -7445,130 -7498.07,76.93 -7701.38,76.93 -7720,58.31 U10.11
8_ROW3: *7.8 U10.6 | length 564.9
  Top Layer w20: v1(-7970,-120) U10.6
  Bottom Layer w20: v1(-7970,-120) -7694.61,-120 -7640,-174.61 *7.8
8_ROW4: *7.12 U10.7 | length 1611.8
  Top Layer w20: *7.12 -7940,745 -7895,790 -7570,790 -7505,725 -7505,211.93 -7596.93,120 -7855,120 -7920,55 U10.7
8_ROW5: *7.1 U10.3 | length 437.1
  Top Layer w20: *7.1 -8340,-165 -8295,-120 -8160,-120 -8120,-80 U10.3
8_ROW6: *7.7 U10.10 | length 283.5
  Top Layer w20: U10.10 -7770,-120 -7735,-155 -7735,-270 *7.7
8_ROW7: *7.2 U10.5 | length 434.2
  Top Layer w20: *7.2 -8240,-200 -8205,-165 -8075,-165 -8020,-110 U10.5
8_ROW8: *7.5 U10.8 | length 295.9
  Top Layer w20: *7.5 -7940,-185 -7870,-115 U10.8
24V: C8.1 C9.1 D1.2 U3.1
CLK: U1.10 U4.13 U5.13 U6.13 U7.13 U8.13 U9.13 U10.13 U11.13 | length 13889.9
  Top Layer w10: v1(-7670,210) U10.13 ; U11.13 v1(-6390,525) ; v1(-6120,530) -6120,817.38 -6037.38,900 -4885,900 -4825,840 ; U9.13 v1(-5100,450) ; v1(-4825,450) -4825,840 ; v1(-3535,460) -3535,700 ; U7.13 v1(-2470,455) ; v1(-2205,455) -2205,720 ; U6.13 v1(-1200,465) ; v1(-960,465) -960,900 ; v1(50,264) U5.13 ; v1(250,790) 250,850 200,900 -960,900 ; v1(1100,275) U4.13 ; -4825,840 -4825,841.38 -4808.62,825 -3660,825 -3535,700 ; -3535,700 -3425,810 -2295,810 -2205,720 ; -2205,720 -2025,900 -960,900
  Top Layer w20: U8.13 v1(-3785,460)
  Bottom Layer w10: v1(-7670,210) -7045,210 -6936,319 -6486,319 -6390,415 v1(-6390,525) -6125,525 v1(-6120,530) ; v1(-5100,450) v1(-4825,450) ; v1(-2470,455) v1(-2205,455) ; v1(-1200,465) v1(-960,465) ; v1(50,264) 51,265 195,265 250,320 250,620 ; v1(250,790) 250,620 ; U1.10 600,553.35 ; v1(1100,275) 945,430 945,515 906.65,553.35 600,553.35 ; 250,620 568.35,620 600,588.35 600,553.35
  Bottom Layer w20: v1(-3785,460) v1(-3535,460)
CS: U1.11 U4.12 U5.12 U6.12 U7.12 U8.12 U9.12 U10.12 U11.12 | length 14659
  Top Layer w10: -6256.38,-455 -6255,-453.62 ; U5.12 50,-50 70,-70 130,-70 150,-90 150,-170 125,-195 125,-366.65
  Top Layer w20: U10.12 -7670,-141.38 -7356.38,-455 -6256.38,-455 -6231.38,-455 ; U11.12 -6390,-91.38 -6231.38,-250 -6231.38,-455 ; U9.12 -5100,-80 -4945,-235 -4945,-455 ; U8.12 -3785,-101.38 -3616.38,-270 -3616.38,-357.5 ; U7.12 -2470,-132.22 -2360,-242.22 -2360,-391.38 ; U6.12 -1200,-96.38 -940,-356.38 -940,-455 ; 125,-366.65 125,-455 ; v2(345,-360) 345,-406.38 ; U4.12 1581.42,-8.07 1680,-106.65 1680,-349.58 1574.58,-455 393.62,-455 345,-406.38 ; -6231.38,-455 -4945,-455 ; -4945,-455 -3896.38,-455 -3798.88,-357.5 -3616.38,-357.5 ; -3616.38,-357.5 -3528.88,-357.5 -3431.38,-455 -2423.62,-455 -2360,-391.38 ; -2360,-391.38 -2296.38,-455 -940,-455 ; -940,-455 125,-455 ; 125,-455 299,-455 345,-409 345,-406.38
  Bottom Layer w10: v2(345,-360) 345,-25 400,30 400,175 U1.11
DATA: U1.12 U4.1 | length 586.6
  Top Layer w10: U4.1 v1(550,145)
  Bottom Layer w10: v1(550,145) 799,394 799,474 U1.12
GND: C1.1 C5.1 C6.2 C7.2 C8.2 C9.2 C10.1 C11.1 C12.1 C13.2 C14.2 C15.2 C16.1 C17.1 C18.1 C19.2 C20.2 C21.2 C22.1 C23.1 C24.2 C25.2 D2.1 D5.2 J1.1 P1.1 U1.22 U2.15 U3.3 U3.5 U4.4 U4.9 U5.4 U5.9 U6.4 U6.9 U7.4 U7.9 U8.4 U8.9 U9.4 U9.9 U10.4 U10.9 U11.4 U11.9 | length 459.5
  Top Layer w10: U4.4 v2(700,70.24) ; U4.9 v2(950,70.24)
  Top Layer w20: U10.4 v2(-8070,77.93) ; C13.2 1493.62,270.55 v2(1493.62,330)
  Bottom Layer w20: v2(-7741.38,906) D5.2 ; P1.1@1367.24,957.24 P1.1 ; C1.1 v2(1853.62,-245)
NetC2_1: C2.1 U2.3 | length 248.7
  Bottom Layer w20: U2.3 1825.35,15.35 1880,-39.29 C2.1
NetC2_2: C2.2 U2.1 | length 247
  Bottom Layer w20: U2.1 1925.35,10.35 1929.65,10.35 1970,-30 C2.2
NetC3_2: C3.2 U2.2 | length 597.7
  Bottom Layer w10: C3.2 1858.62,-365 1925,-298.62 1925,-30 1875.35,19.65 U2.2
NetC4_1: C4.1 U2.4 | length 226
  Bottom Layer w20: C4.1 U2.4
NetC4_2: C4.2 U2.5 | length 242.6
  Bottom Layer w20: C4.2 1685.35,-15 1725.35,25 U2.5
NetC5_2: C5.2 U2.6 | length 277.7
  Bottom Layer w20: C5.2 1635,-10 1675.35,30.35 U2.6
NetD1_1: D1.1 J1.2 | length 0.7
  Bottom Layer w50: D1.1@-8102.67,950.5 D1.1
NetD2_2: D2.2 L1.1 U3.2 | length 985.1
  Bottom Layer w30: -7380,-390 -7270,-280 D2.2 -7270,35 -7155,150 L1.1
NetD3_1: D3.1 R1.1 | length 103.5
  Bottom Layer w20: R1.1 951.5,987.15 1053.56,987.15 D3.1
NetD4_1: D4.1 R2.1 | length 108.1
  Bottom Layer w30: D4.1@550.94,986.65 R2.1
NetD5_1: D5.1 R3.1 | length 155
  Bottom Layer w30: D5.1 -7421,906 R3.1
NetU4_24: U4.24 U5.1 | length 1924.6
  Top Layer w10: v1(-500,-90) U5.1 ; U4.24 v1(550,560)
  Bottom Layer w10: v1(-500,-90) -500,-30 -460,10 305,10 345,50 345,525 380,560 v1(550,560)
NetU5_24: U5.24 U6.1 | length 2676.9
  Top Layer w10: v1(-680,440) -520,440 -500,420 U5.24
  Top Layer w20: v1(-1805,-370) -1860,-370 -1905,-325 -1905,-160 -1855,-110 -1790,-110 -1750,-70 U6.1
  Bottom Layer w20: v1(-1805,-370) -745,-370 -680,-305 v1(-680,440)
NetU7_24: U7.24 U8.1 | length 2649.5
  Top Layer w20: v1(-4445,-100) -4375,-100 -4335,-60 U8.1 ; v1(-3110,440) -3055,440 -3020,405 U7.24
  Bottom Layer w20: v1(-4445,-100) -4500,-155 -4500,-296.38 -4461.38,-335 -3261.38,-335 -3195,-268.62 -3195,240 -3110,325 v1(-3110,440)
NetU8_24: U8.24 U9.1 | length 2564.6
  Top Layer w20: v1(-5825,-265) -5825,-168.62 -5766.38,-110 -5690,-110 -5650,-70 U9.1 ; v1(-4425,264) -4360,264 -4335,289 U8.24
  Bottom Layer w20: v1(-5825,-265) -5825,-320 -5760,-385 -4700,-385 -4620,-305 -4620,180 -4536,264 v1(-4425,264)
NetU10_1: U10.1 U11.24 | length 1128.1
  Top Layer w20: U10.1 -8220,135 ; v1(-7275,353.07) -7275,425 -7245,455 -6980,455 -6940,415 U11.24
  Bottom Layer w20: -7645,340 -7550,245 -7330,245 -7275,300 v1(-7275,353.07)
RS232_RXD: P1.2 U2.13 | length 809.6
  Bottom Layer w20: P1.2@1454.53,951.46 P1.2 1447.36,948.05 1775.35,620.06 U2.13
RS232_TXD: P1.3 U2.14 | length 787.6
  Bottom Layer w20: P1.3 1825.35,659.37 U2.14
TTL_RXD: D3.2 U1.35 U2.12 | length 2019.8
  Bottom Layer w10: U1.35 1100,13.35 1165,78.35 1413.35,78.35 1525,190 1695,190 1725.35,220.35 U2.12 1725.35,601.99 1542.35,785 1263.62,785 1144.06,904.56 D3.2
TTL_TXD: D4.2 U1.34 U2.11 | length 2710.9
  Bottom Layer w10: D4.2 460.94,837.68 538.62,760 1513.35,760 1675.35,597.99 U2.11 1675.35,241.35 1644,210 1496.65,210 1400,113.35 1130,113.35 1000,-16.65 U1.34
pads on no net: H1.H H2.H H3.H H4.H H5.H H6.H U1.1 U1.2 U1.3 U1.4 U1.5 U1.6 U1.7 U1.8 U1.9 U1.13 U1.14 U1.15 U1.16 U1.17 U1.18 U1.19 U1.20 U1.21 U1.24 U1.25 U1.26 U1.27 U1.28 U1.29 U1.30 U1.31 U1.32 U1.33 U1.36 U1.37 U1.38 U1.39 U1.40 U2.7 U2.8 U2.9 U2.10 U10.24

## Keep-outs
Keep-Out Layer:
  the board outline again, w5

## Other copper
Top Layer:
  region net CS: 1130.33,-6.07 1103.88,-32.53 1103.88,20.38

## Silkscreen, mask and mechanical layers (free items; w line width, h text height)
Bottom Overlay:
  text "GND" at 1415,1015 h30
  text "RX" at 1490,1015 h30
  text "TX" at 1565,1015 h30
  text "RS232" at 1768.62,865 h30
  text "GND" at -8406.38,825 h45
  text "+24V" at -8191.38,825 h45

## Text inside footprints (layer, text, board x,y; h text height)
C6: Bottom Overlay "+" at -6001.38,-136.57 h80 r270
C8: Bottom Overlay "+" at -7491.38,450 h80 r90